# EAGLE board IR Sensor (EAGLE 9.6.2)
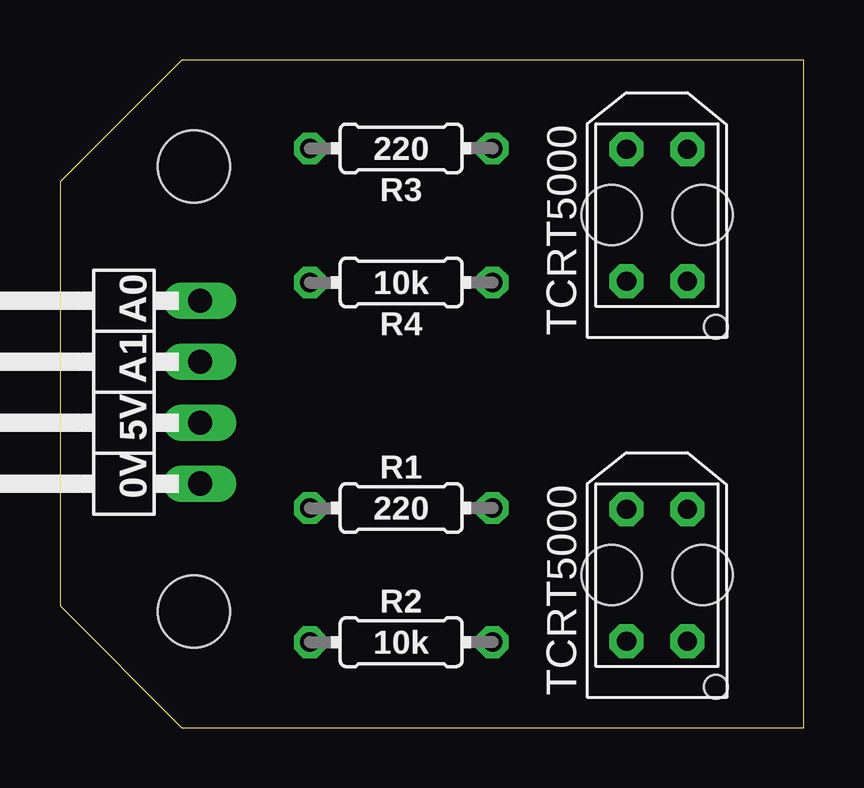
[diagram p0: board, top side]
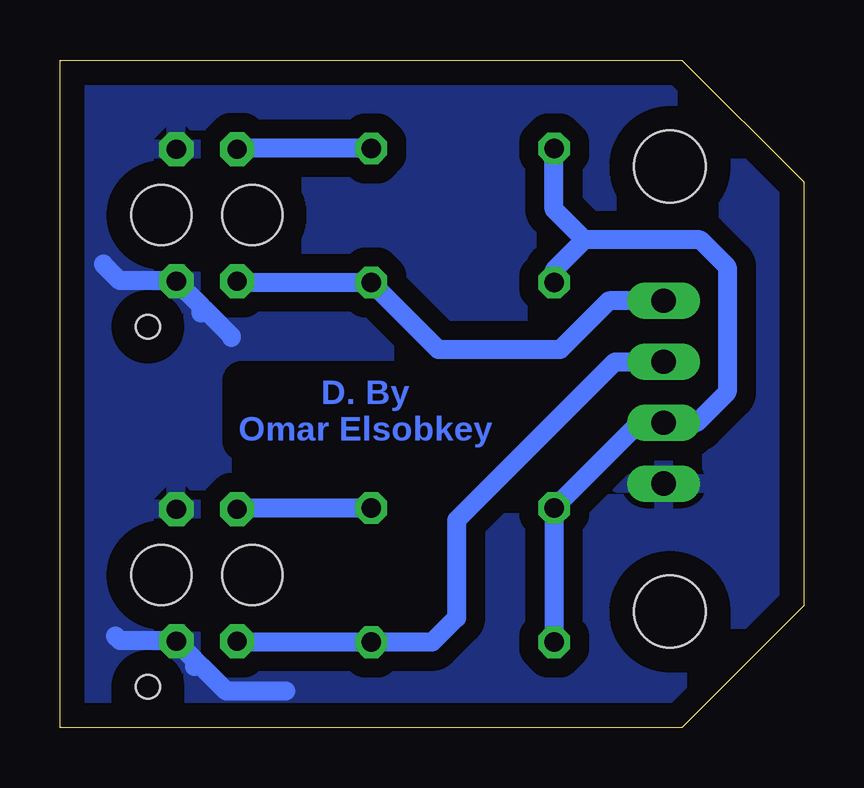
[diagram p1: board, bottom side, seen from below]

Size 31.01 x 27.81 mm. Coordinates in mm from the lower left corner, seen from the top.
Outline: 0,22.73 0,5.08 5.08,0 31.01,0 31.01,27.81 5.08,27.81 0,22.73
Copper layers (1*16): Top 0.035mm / dielectric 1.5mm / Bottom 0.035mm
Design rules "default *": minimum track width 0.8mm, minimum drill 0.7mm, track to track 0.6mm, track to pad 0.6mm, pad to pad 0.6mm, via to via 0.6mm, smd to smd 6mil, copper to edge 40mil, drill to drill 6mil, minimum pad ring 10mil, minimum via ring 8mil, stop-mask expansion 4mil, vias tented up to drill 0mil, thermal gap 10mil
Holes 3 mm at 5.59,23.37 5.59,4.83

## Footprints (pad centres in the part's own frame; a part is rotated, then mirrored left to right if it is on the bottom)
1X04/90 = drill 1.016 long: 1 -3.81,-3.81; 2 -1.27,-3.81; 3 1.27,-3.81; 4 3.81,-3.81
0204/7 = drill 0.813 octagon: 1 -3.81,0; 2 3.81,0
5000 = drill 0.8 pad 1.422 octagon: P$1 -2.75,1.27; P$2 -2.75,-1.27; P$3 2.75,1.27; P$4 2.75,-1.27 | hole 2.5: 0,1.9; 0,-1.9 | hole 1: -4.65,-2.45

## Placement (x,y rotation side)
JP1  [1X04/90]  2.03,13.97 90 top
R1  220  [0204/7]  14.22,9.14 180 top
R2  10k  [0204/7]  14.22,3.56 180 top
R3  220  [0204/7]  14.22,24.13 180 top
R4  10k  [0204/7]  14.22,18.54 180 top
SENS-1  TCRT5000  [5000]  24.89,6.35 90 top
SENS-2  TCRT5000  [5000]  24.89,21.35 90 top

## Library data of the parts
JP1 = pinhead
R1-R4 = rcl; SPICEPREFIX: R
SENS-1 SENS-2 = IR Sensors

## Nets
+5V: JP1.2 R1.2 R2.2 R3.2 R4.2
A0: JP1.4 R4.1 SENS-2.P$1
A1: JP1.3 R2.1 SENS-1.P$1
GND: JP1.1 SENS-1.P$2 SENS-1.P$4 SENS-2.P$2 SENS-2.P$4
N$1: R1.1 SENS-1.P$3
N$2: R3.1 SENS-2.P$3

## Tracks (layer width: path | path; a pad name or v marks a point on that pad's centre or on a via)
+5V
  Bottom 0.8: 9.14,20.32 4.32,20.32 3.19,19.2 3.19,13.97 4.46,12.7 JP1.2 6.86,12.7 R1.2 R2.2 | 9.14,20.32 10.41,19.05 R4.2 | 9.14,20.32 10.41,21.59 R3.2
A0
  Bottom 0.8: SENS-2.P$1 23.56,18.54 R4.1 15.24,15.75 10.16,15.75 8.13,17.78 JP1.4
A1
  Bottom 0.8: SENS-1.P$1 23.58,3.56 R2.1 15.49,3.56 14.48,4.57 14.48,8.64 7.87,15.24 JP1.3
GND
  Bottom 0.8: SENS-1.P$2 25.4,2.84 25.4,2.54 | SENS-2.P$2 25.15,17.58 25.15,17.27 | SENS-2.P$2 23.88,16.31 23.88,16.26 | SENS-1.P$2 24.09,1.52 21.59,1.52 | SENS-2.P$2 26.53,18.6 26.55,18.62 28.52,18.62 29.21,19.3 | SENS-1.P$2 26.53,3.6 26.55,3.62 28.51,3.62 28.7,3.81
  pour Bottom (isolate 0.8): -1.02,29.21 33.02,29.21 33.02,-1.27 -1.02,-1.27
N$1
  Bottom 0.8: R1.1 23.58,9.14 SENS-1.P$3
N$2
  Bottom 0.8: R3.1 23.59,24.13 SENS-2.P$3

## Text on the board
Bottom: D. By / Omar Elsobkey
tNames: 0V 5V A1 A0